# Altium PCB biv2-batb_1a.PcbDoc
Units mm, origin at the board's own origin, x right, y up, seen from the top; angles counter-clockwise.
Board outline 33 x 33 mm, 2 copper layers (Top Layer, Bottom Layer), stack 1.535 mm thick; 10 components, 10 nets, 39 pads, 15 vias.
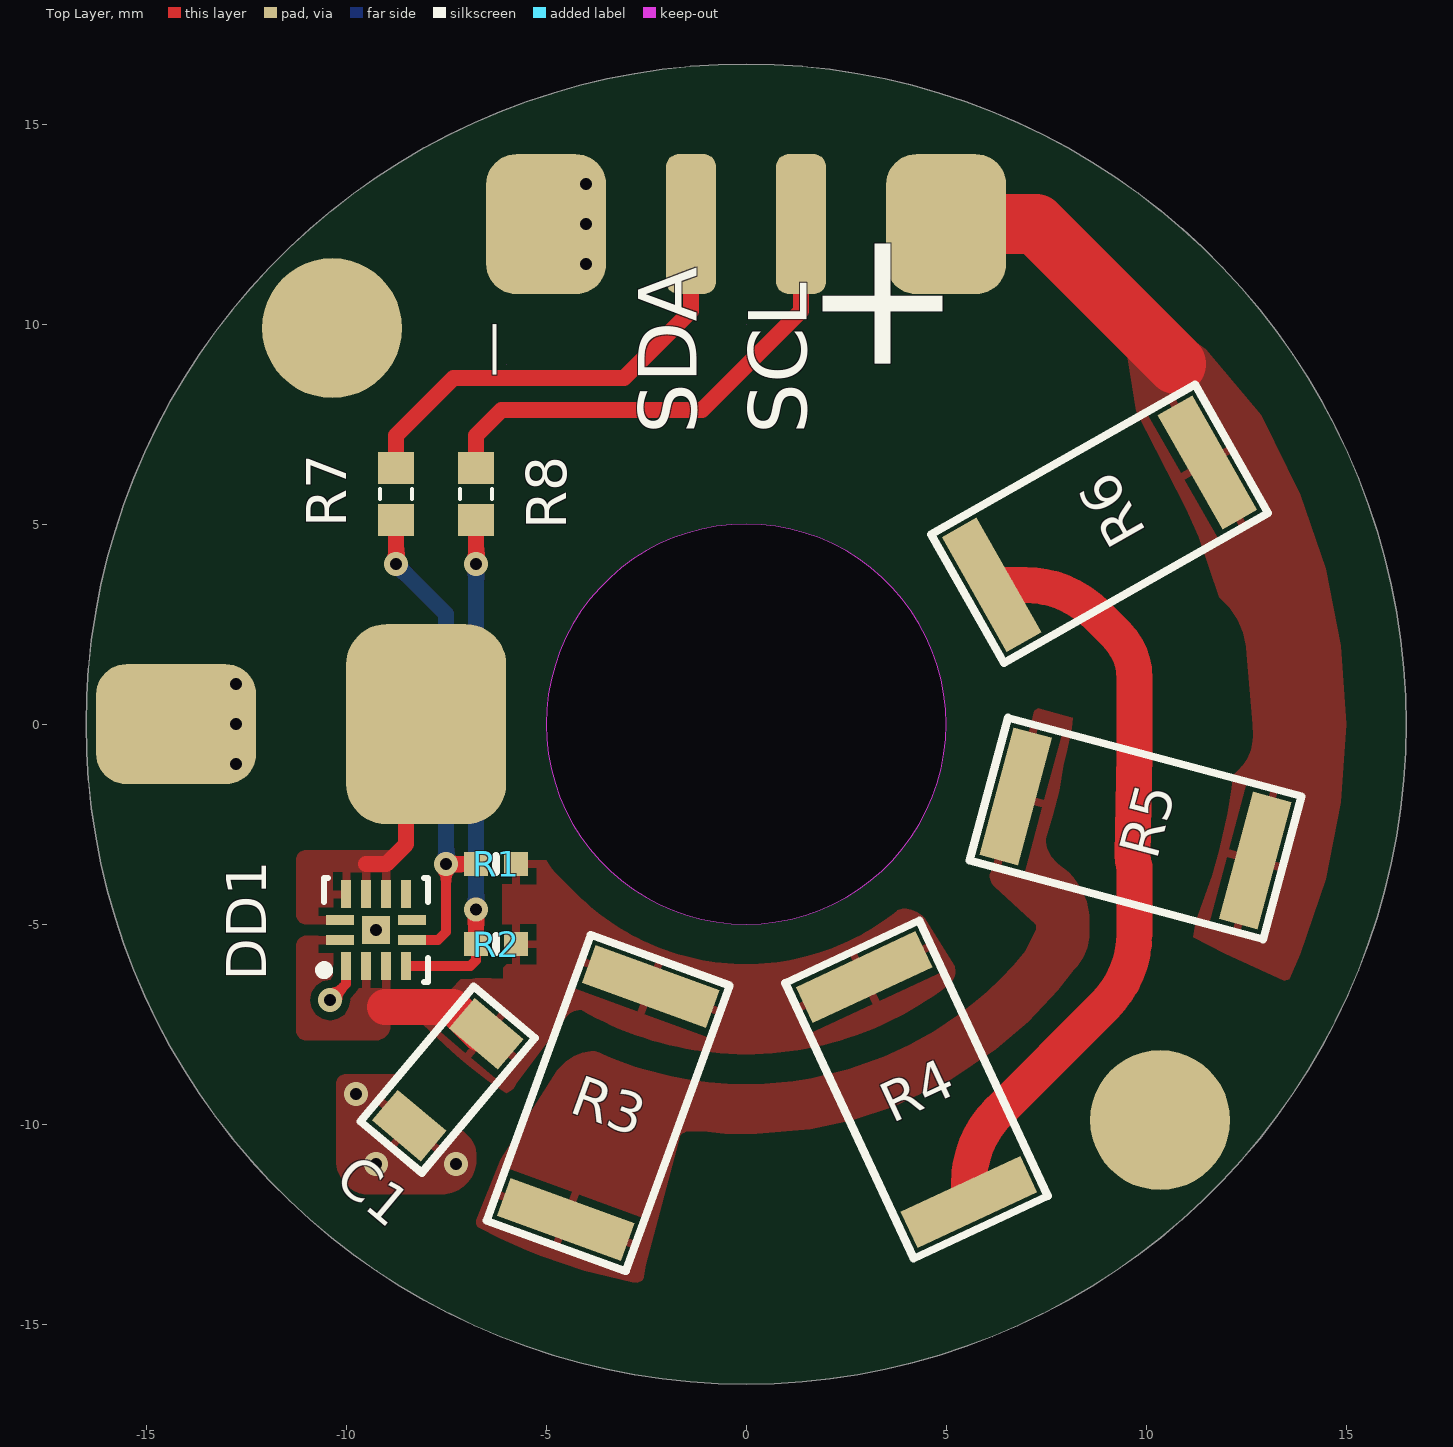
[diagram p0: Top Layer view]
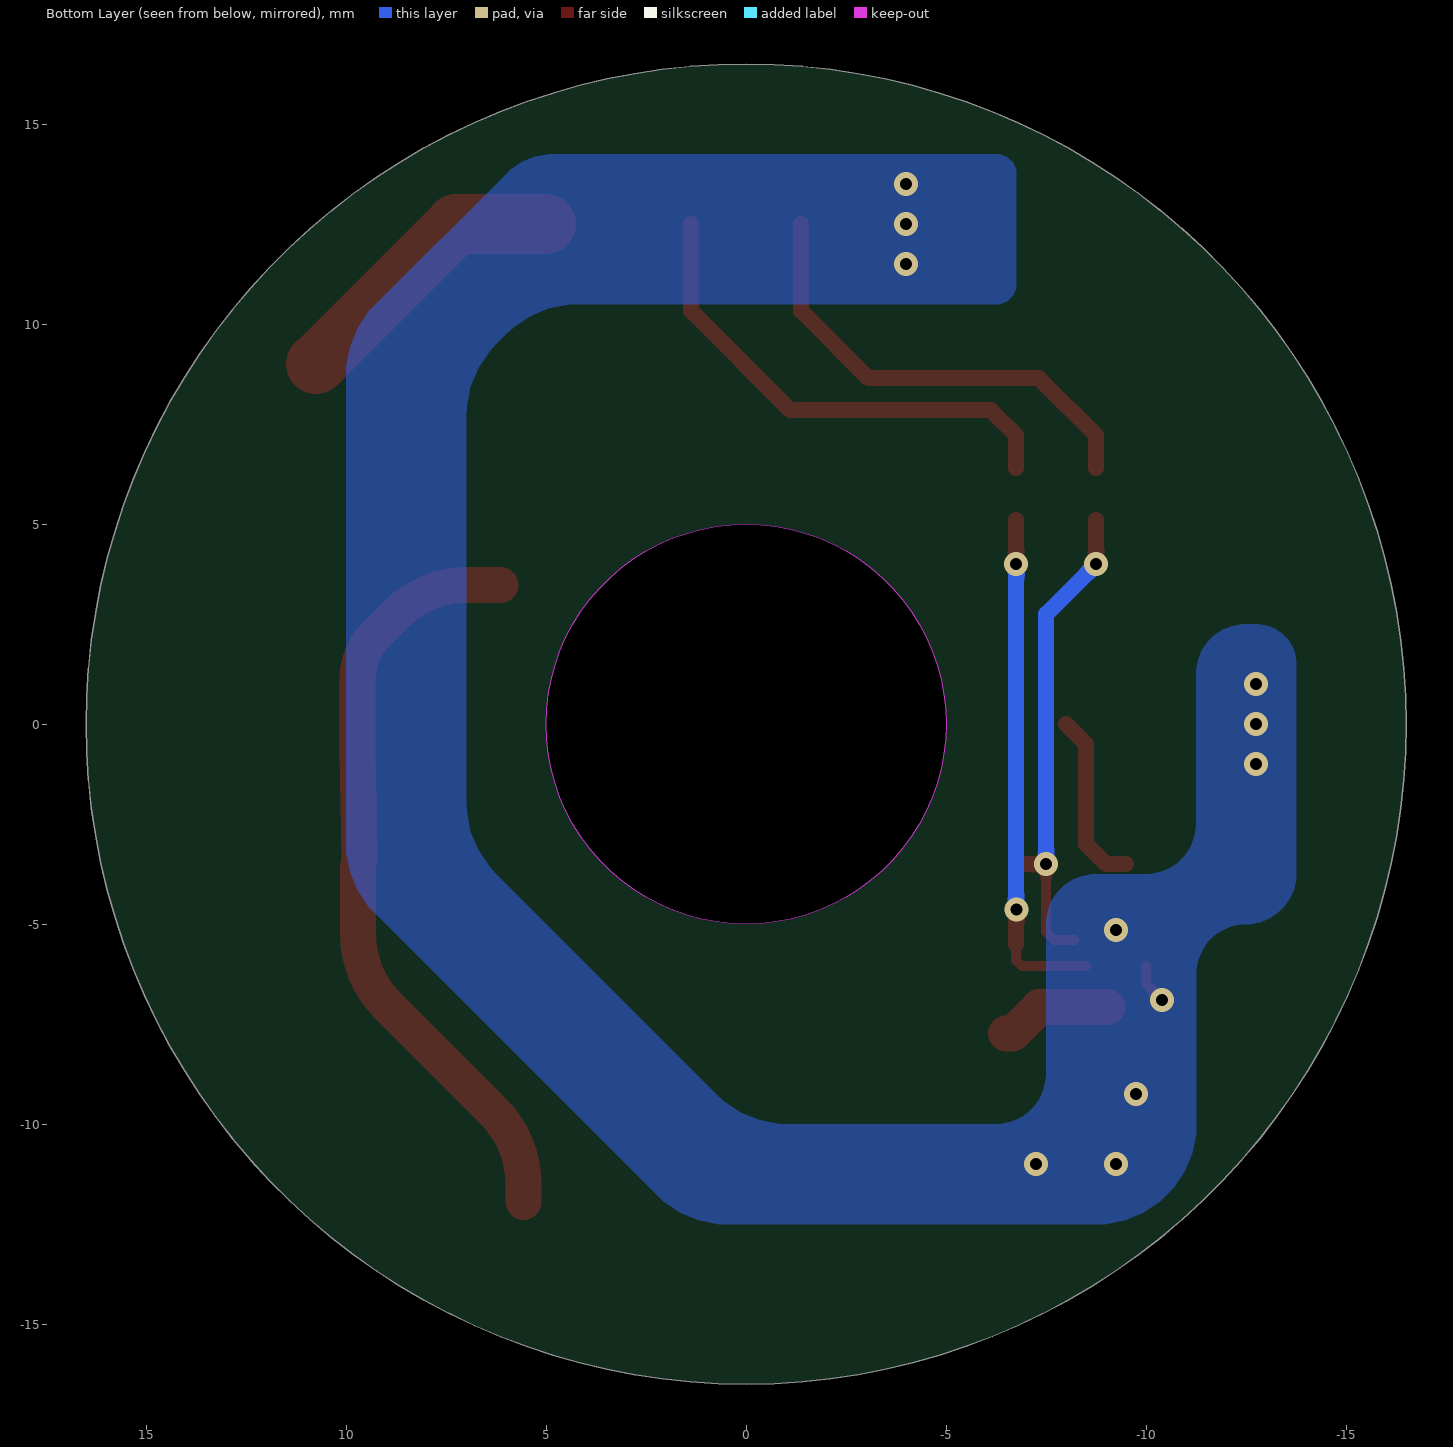
[diagram p1: Bottom Layer view, seen from below]
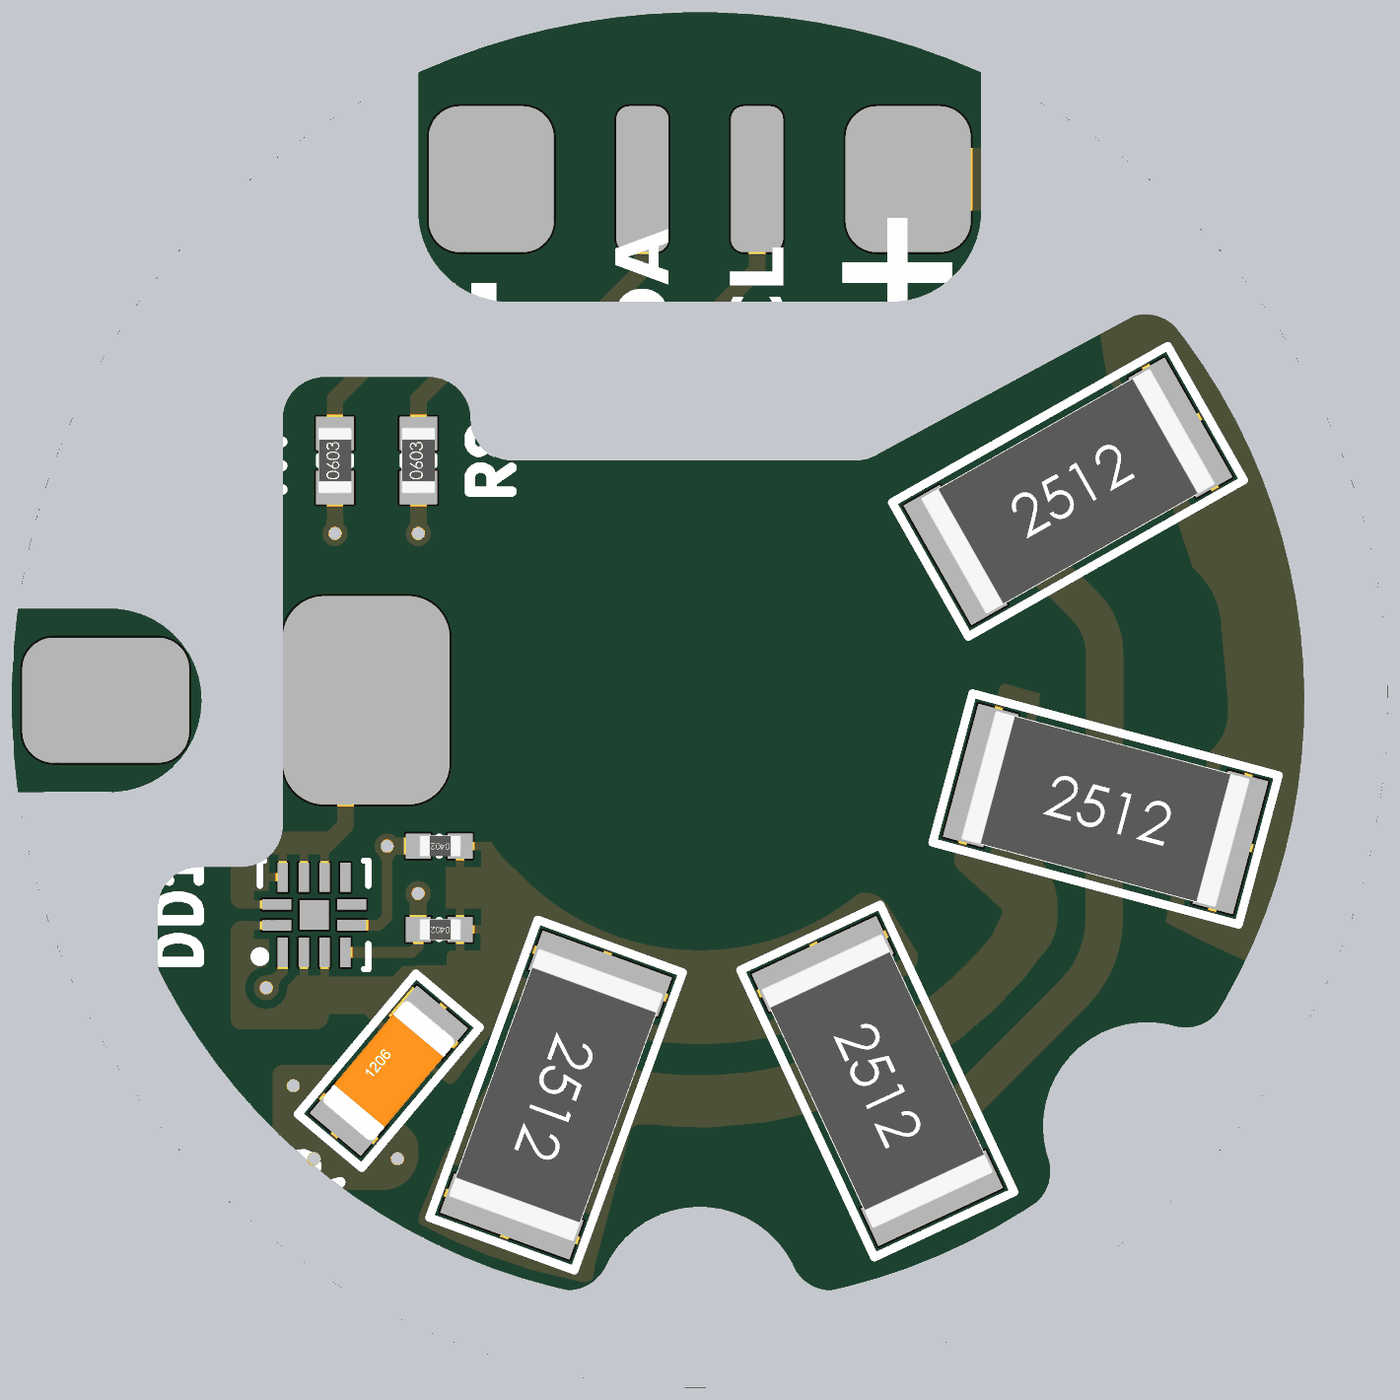
[diagram p2: 3D render of the assembled board from above, using the file's embedded part models]

## Layer stack, top to bottom
Top Solder: solder mask 0.0254, SM-001, Dk 4
Top Layer: signal copper 0.018
Dielectric 1: core 1.4986, Core-043, Dk 4.3
Bottom Layer: signal copper 0.018
Bottom Solder: solder mask 0.0254, SM-001, Dk 4

## Board outline
-16.5,0 ccw(c0,0) 0,-16.5 ccw(c0,0) 16.5,0 ccw(c0,0) 0,16.5 ccw(c0,0)
cut-out: -5,0 ccw(c0,0) 0,-5 ccw(c0,0) 5,0 ccw(c0,0) 0,5 ccw(c0,0)
cut-out: -6,9
cut-out: 0,10

## Design rules (kind name [scope] priority, off if disabled: settings)
AcuteAngle [All] p1: minimum=3.50000000000000E+0001 checktracksonly=FALSE
BoardOutlineClearance "BoardOutlineClearance 1" [All] p1: gap=0.25 ignorepadtopadclearanceinfootprint=FALSE except(0: Arc-SplitContinuation Track-SplitContinuation SMDPad-SplitContinuation THPad-SplitContinuation Via-SplitContinuation Fill-SplitContinuation Poly-SplitContinuation Region-SplitContinuation Text-SplitContinuation) // Milling
BoardOutlineClearance "BoardOutlineClearance 2" [All] p2: gap=0.4 ignorepadtopadclearanceinfootprint=FALSE except(0: Arc-SplitContinuation Track-SplitContinuation SMDPad-SplitContinuation THPad-SplitContinuation Via-SplitContinuation Fill-SplitContinuation Poly-SplitContinuation Region-SplitContinuation Text-SplitContinuation) // V-Cut
Clearance POWER [InNet('BAT_IN+') vs InNet('BAT_IN+')] p1: gap=0.125 ignorepadtopadclearanceinfootprint=FALSE except(0: SMDPad-Fill SMDPad-Poly SMDPad-Region; 0.1: Arc-Fill Arc-Poly Arc-Region Track-Fill Track-Poly Track-Region THPad-Fill THPad-Poly THPad-Region Via-Fill Via-Poly Via-Region Fill-Fill Fill-Poly Fill-Region Poly-Poly Poly-Region Region-Region; 0.2: SMDPad-SMDPad Fill-Text Poly-Text Region-Text; 0.25: Arc-Hole Track-Hole SMDPad-Hole THPad-Hole Via-Hole Fill-Hole Poly-Hole Region-Hole Text-Hole)
Clearance "Clearance-1 1 Oz" [All] p2: gap=0.2 ignorepadtopadclearanceinfootprint=TRUE except(0.25: Arc-Hole Track-Hole SMDPad-Hole THPad-Hole Via-Hole Fill-Hole Poly-Hole Region-Hole Text-Hole) // Standart
Clearance "Clearance-1 1/2 Oz" [All] p3: gap=0.125 ignorepadtopadclearanceinfootprint=FALSE except(0.2: Arc-Fill Arc-Poly Track-Fill Track-Poly SMDPad-SMDPad SMDPad-Fill SMDPad-Poly THPad-Fill THPad-Poly Via-Fill Via-Poly Fill-Fill Fill-Poly Poly-Poly Poly-Region Poly-Text; 0.25: Arc-Hole Track-Hole SMDPad-Hole THPad-Hole Via-Hole Fill-Hole Poly-Hole Region-Hole Text-Hole) // Standart
DiffPairsRouting "DiffPairsRouting 1 Oz" [All] p1: maxlimit=0.254 minlimit=0.2 mostfreqgap=0.254 toplayer_minwidth=0.2 toplayer_maxwidth=0.381 toplayer_prefwidth=0.381 bottomlayer_minwidth=0.2 bottomlayer_maxwidth=0.381 bottomlayer_prefwidth=0.381 maxuncoupledlength=12.7
DiffPairsRouting "DiffPairsRouting 1/2 Oz" [All] p2: maxlimit=0.254 minlimit=0.1 mostfreqgap=0.254 toplayer_minwidth=0.1 toplayer_maxwidth=0.381 toplayer_prefwidth=0.381 bottomlayer_minwidth=0.1 bottomlayer_maxwidth=0.381 bottomlayer_prefwidth=0.381 maxuncoupledlength=12.7
HoleSize "Minimum HoleSize" [IsPad] p1: absolutevalues=TRUE maxlimit=5.9 minlimit=0.6 maxpercent=80.000 minpercent=20.000
HoleSize "Minimum HoleSize VIA 1" [IsVia] p2: absolutevalues=TRUE maxlimit=5.9 minlimit=0.3 maxpercent=80.000 minpercent=20.000 // Standart
HoleToHoleClearance Hole2HoleClearance [All] p1: gap=0.25 allowstackedmicrovias=FALSE
MinimumAnnularRing "Minimum AR VIA Standart" [IsVia] p1: minimumring=0.15
MinimumAnnularRing "Minimum AR PAD Standart" [IsPAD] p2: minimumring=0.2
MinimumAnnularRing "Minimum AR VIA Advance" [IsVia] p3: minimumring=0.1
MinimumAnnularRing "Minimum AR PAD Advance" [IsPAD] p4: minimumring=0.15
MinimumSolderMaskSliver "SolderMask Bridge Standart" [All] p1: minsoldermaskwidth=0.15 // All Masks
MinimumSolderMaskSliver "SolderMask Bridge Advance" [All] p2: minsoldermaskwidth=0.1 // Mask LDI
PlaneClearance "PlaneClearance 1 Oz" [All] p1: clearance=0.2
PlaneClearance "PlaneClearance-1 1/2 Oz" [All] p2: clearance=0.2 // Standart
PlaneConnect "TermalConnect-1 1 Oz" [All] p1: planeconnectstyle=Relief reliefexpansion=0.2 reliefentries=4 reliefconductorwidth=0.2 reliefairgap=0.2 // Standart
PolygonConnect "PolygonConnect-1 1 Oz" [All] p1: thpad.connectstyle=Relief thpad.reliefconductorwidth=0.2 thpad.reliefentries=4 thpad.polygonreliefangle="90 Angle" thpad.airgapwidth=0.2 smdpad.connectstyle=Relief smdpad.reliefconductorwidth=0.2 smdpad.reliefentries=4 smdpad.polygonreliefangle="90 Angle" smdpad.airgapwidth=0.2 via.connectstyle=Direct via.reliefconductorwidth=0.254 via.reliefentries=4 via.polygonreliefangle="90 Angle" via.airgapwidth=0.254 // Standart
PolygonConnect "PolygonConnect-1 1/2 Oz" [All] p2: thpad.connectstyle=Relief thpad.reliefconductorwidth=0.15 thpad.reliefentries=4 thpad.polygonreliefangle="90 Angle" thpad.airgapwidth=0.2 smdpad.connectstyle=Relief smdpad.reliefconductorwidth=0.2 smdpad.reliefentries=4 smdpad.polygonreliefangle="90 Angle" smdpad.airgapwidth=0.2 via.connectstyle=Direct via.reliefconductorwidth=0.254 via.reliefentries=4 via.polygonreliefangle="90 Angle" via.airgapwidth=0.254 // Standart
RoutingCorners [All] p1 off: cornerstyle=45-Degree minsetback=2.54 maxsetback=2.54
RoutingVias [All] p1: holewidth=0.3 width=0.6 viastyle="Through Hole" minholewidth=0.2 minwidth=0.4 maxholewidth=5.9 maxwidth=6.4
ShortCircuit [All] p1: allowed=TRUE
SilkToSilkClearance Silk2SilkClearance [All] p1 off: silktosilkclearance=0.15
SilkToSolderMaskClearance Silk2SolderMaskClearance [IsPad] p1 off: minsilkscreentomaskgap=0.15 clearancetoexposedcopper=TRUE
SolderMaskExpansion SolderMaskExpansion-1 [All] p1: expansion=0.05 istentingtop=FALSE // Standart
SolderMaskExpansion "SolderMaskExpansion LDI" [All] p2: expansion=0.025 istentingtop=FALSE // Advance
UnRoutedNet [All] p1: checkbadconnections=TRUE
Width "Width 1 Oz" [All] p1: maxlimit=10 minlimit=0.15 preferedwidth=0.2 checkconnectedcopper=TRUE
Width "Width 1/2 Oz" [All] p2: maxlimit=10 minlimit=0.1 preferedwidth=0.125 checkconnectedcopper=TRUE
19 further rules are at their usual default settings.

## Components (designator, comment, footprint, x,y, rotation, side; value= is the part's Value field where it differs from the comment)
C1 "Ceramic capacitor, 100u, X7R, ±10%, 6V, 1206, -55...+125°C" "CAP: 1206" -7.459,-8.889 r50 top value=100u
DD1 "LTC3337" 12-LFCSP -9.25,-5.15 r90 top
R1 "Resistor film, 10k, , 0402, 0.063W, -55...+125°C" "RES: 0402" -6.25,-3.5 r180.04 top value=10k
R2 "Resistor film, 10k, , 0402, 0.063W, -55...+125°C" "RES: 0402" -6.25,-5.5 r179.88 top value=10k
R3 "Resistor film, 3.6, ±5%, 2512, 1W, -55...+125°C" "RES: 2512" -3.448,-9.472 r250 top value=3.6
R4 "Resistor film, 3.6, ±5%, 2512, 1W, -55...+125°C" "RES: 2512" 4.26,-9.136 r295 top value=3.6
R5 "Resistor film, 3.6, ±5%, 2512, 1W, -55...+125°C" "RES: 2512" 9.737,-2.609 r345 top value=3.6
R6 "Resistor film, 3.6, ±5%, 2512, 1W, -55...+125°C" "RES: 2512" 8.835,5.012 r29.57 top value=3.6
R7 "Resistor film, 240R, ±5%, 0603, 0.1W, -55...+125°C" "RES: 0603" -8.75,5.75 r90 top value=240R
R8 "Resistor film, 240R, ±5%, 0603, 0.1W, -55...+125°C" "RES: 0603" -6.75,5.75 r90 top value=240R

## Footprints (in the part's own frame and the unit in brackets; to place one, negate y for a bottom-side part, rotate by r counter-clockwise, add the part's x,y. Pads: shape width x height; smd on the part's side, far side on the other; paste and mask are expansions set on the pad)
12-LFCSP [mm]
  rect 0.7x0.25 smd: 1(-0.9,0.75) 2(-0.9,0.25) 3(-0.9,-0.25) 4(-0.9,-0.75) 7(0.9,-0.75) 8(0.9,-0.25) 9(0.9,0.25) 10(0.9,0.75)
  rect 0.25x0.7 smd: 5(-0.25,-0.9) 6(0.25,-0.9) 11(0.25,0.9) 12(-0.25,0.9)
  rect 0.7x0.7 smd: 13(0,0)
  silkscreen extent -1.3,-1.3 1.3,1.4, body extent -1,-1 2.5,1, height 1.27
"CAP: 1206" [mm]
  rect 1x1.6 smd: 1(-1.5,0) 2(1.5,0)
  silkscreen extent -2.2,-1 2.2,1, body extent -1.6,-0.8 1.6,0.8, height 1
"RES: 0402" [mm]
  rect 0.6x0.6 smd: 1(-0.5,0) 2(0.5,0)
  silkscreen extent 0,-0.2 0,0.2, body extent -0.53,-0.25 0.47,0.25, height 0.34
"RES: 0603" [mm]
  rect 0.8x0.9 smd: 1(-0.65,0) 2(0.65,0)
  silkscreen extent -0.13,-0.4 0.13,0.4, body extent -0.8,-0.4 0.8,0.4, height 0.44
"RES: 2512" [mm]
  rect 1x3.3 smd: 1(-3.1,0) 2(3.1,0)
  silkscreen extent -3.8,-1.85 3.8,1.85, body extent -3.18,-1.6 3.18,1.6, height 0.52

## Part data
C1: library part Ceramic_1206, Manufacturer=Yageo, Package=1206, PartNumber=CC1206KRX7R9BB104, Temperature=-55...+125°C, Tolerance=±10%, TypeCapacitor="Ceramic capacitor", TypeDielectric=X7R, Voltage=6V, HelpURL=https://www.digikey.com/product-detail/en/yageo/CC1206KRX7R9BB104/311-1179-1-ND/303089, ValueManufacturerPartNumber="Ceramic capacitor, 100u, X7R, ±10%, 6V, 1206, -55...+125°C"
DD1: "Battery SOH monitor", ComponentLink1Description=Datasheet, ComponentLink1URL=https://www.analog.com/en/products/ltc3337.html
R1 R2: library part Resistor_0402, Manufacturer=Yageo, Package=0402, PartNumber=RC0402JR-07100RL, Power=0.063W, Temperature=-55...+125°C, TypeResistor="Resistor film", HelpURL=https://www.digikey.com/product-detail/en/yageo/RC0402JR-07100RL/311-100JRCT-ND/729362, ValueManufacturerPartNumber="Resistor film, 10k, , 0402, 0.063W, -55...+125°C"
R3 R4 R5 R6: library part Resistor_2512, Manufacturer=Yageo, Package=2512, PartNumber=RC2512JK-07100RL, Power=1W, Temperature=-55...+125°C, Tolerance=±5%, TypeResistor="Resistor film", HelpURL=https://www.digikey.com/product-detail/en/yageo/RC2512JK-07100RL/YAG3393CT-ND/5962215, ValueManufacturerPartNumber="Resistor film, 3.6, ±5%, 2512, 1W, -55...+125°C"
R7 R8: library part Resistor_0603, Manufacturer=Yageo, Package=0603, PartNumber=RC0603JR-07100RL, Power=0.1W, Temperature=-55...+125°C, Tolerance=±5%, TypeResistor="Resistor film", HelpURL=https://www.digikey.com/product-detail/en/yageo/RC0603JR-07100RL/311-100GRCT-ND/729644, ValueManufacturerPartNumber="Resistor film, 240R, ±5%, 0603, 0.1W, -55...+125°C"

## Free pads (board coordinates)
  round 3.5 smd: 0(-10.35,9.9) 0(10.35,-9.9)
  rrect50% 4x3 smd: 1(-14.25,0)
  rrect50% 3x3.5 smd: 1(-5,12.5) 1(5,12.5)
  rrect50% 1.25x3.5 smd: 1(-1.375,12.5) 1(1.375,12.5)
  rrect50% 4x5 smd: 2(-8,-0.001)

## Via types
v1: diameter 0.6, hole 0.3, Top Layer to Bottom Layer, tented both sides, 15 vias

## Nets (pads, with @x,y where several pads share a name; then routed paths per layer and width w, separated by ;. In a path a pad name is that pad's centre, name@x,y a point inside that pad or via, vN(x,y) a via of type N, cw(c..) or ccw(c..) an arc to the next point about the centre after c; other vN are vias at no path point)
+U: pad.1@5,12.5 R5.2 R6.2 | length 7.2
  Top Layer w1.5: pad.1@5,12.5 7.25,12.5 10.75,9
-U: C1.1 DD1.1 DD1.13 pad.1@-5,12.5 pad.1@-14.25,0 | length 1
  Top Layer w0.25: v1(-10.4,-6.9) -10,-6.5 DD1.1
  other v1: -9.25,-11 -7.25,-11 -9.75,-9.25 -9.25,-5.15 -12.75,-1 -12.75,0 -12.75,1 -4,11.5 -4,12.5 -4,13.5
BAT+: C1.2 DD1.2 DD1.3 DD1.12 R1.1 R2.1 R3.1 R4.1 | length 2.8
  Top Layer w0.9: -9.033,-7.078 -7.323,-7.078 -6.661,-7.74 C1.2
BAT_IN+: DD1.8 DD1.9 DD1.10 DD1.11 pad.2 | length 4.4
  Top Layer w0.4: -9.5,-3.5 -9,-3.5 -8.5,-3 -8.5,-0.501 pad.2
NetDD1_4: DD1.4 R2.2 R8.1 | length 12.8
  Top Layer w0.25: DD1.4 -6.896,-6.05 -6.75,-5.904 R2.2
  Top Layer w0.4: v1(-6.756,-4.638) -6.753,-4.641 -6.753,-5.496 R2.2 ; v1(-6.75,4) R8.1
  Bottom Layer w0.25: v1(-6.756,-4.638) v1@-6.75,-4.632
  Bottom Layer w0.4: v1@-6.75,-4.632 v1(-6.75,4)
NetDD1_5: DD1.5 R1.2 R7.1 | length 12.4
  Top Layer w0.25: DD1.5@-8.205,-5.4 -7.7,-5.4 -7.5,-5.2 v1(-7.5,-3.5)
  Top Layer w0.4: v1(-8.75,4) R7.1 ; v1(-7.5,-3.5) R1.2
  Bottom Layer w0.4: v1(-8.75,4) -7.5,2.75 v1(-7.5,-3.5)
NetR3_2: R3.2 R5.1
NetR4_2: R4.2 R6.1 | length 19.3
  Top Layer w0.9: R4.2 5.57,-11.482 cw(c8.11,-11.482) 6.314,-9.686 8.96,-7.04 ccw(c7.163,-5.244) 9.703,-5.244 9.703,-3.558 cw(c10.565,-3.296) 9.665,-3.279 9.713,-0.745 9.713,1.133 ccw(c8.133,1.133) 9.25,2.25 8.761,2.739 ccw(c6.965,0.943) 6.965,3.483 R6.1
SCL: pad.1@1.375,12.5 R8.2 | length 12.4
  Top Layer w0.4: R8.2 -6.75,6.5 -6.75,7.22 -6.12,7.85 -1.105,7.85 1.375,10.33 pad.1@1.375,12.5
SDA: pad.1@-1.375,12.5 R7.2 | length 11.7
  Top Layer w0.4: R7.2 -8.75,6.5 -8.75,7.22 -7.32,8.65 -3.055,8.65 -1.375,10.33 pad.1@-1.375,12.5
pads on no net: DD1.6 DD1.7

## Polygon pours and split planes (outlines as drawn)
BAT+ on Top Layer "BAT+_L01_P013" (solid, pour order 13): 4.465,-4.848 ccw(c3.898,-5.416) 3.898,-4.613 3.836,-4.613 3.776,-4.663 3.653,-4.76 3.527,-4.854 3.398,-4.945 3.268,-5.032 3.135,-5.116 3,-5.196 2.863,-5.273 2.724,-5.346 2.583,-5.416 2.44,-5.481 2.296,-5.543 2.15,-5.601 2.003,-5.656 1.854,-5.706 1.553,-5.796 1.401,-5.834 1.247,-5.869 1.093,-5.9 0.939,-5.926 0.783,-5.949 0.627,-5.967 0.471,-5.982 0.314,-5.992 0.157,-5.998 0,-6 -0.157,-5.998 -0.314,-5.992 -0.471,-5.982 -0.627,-5.967 -0.783,-5.949 -0.939,-5.926 -1.093,-5.9 -1.247,-5.869 -1.401,-5.834 -1.553,-5.796 -1.704,-5.753 -1.854,-5.706 -2.003,-5.656 -2.15,-5.601 -2.296,-5.543 -2.44,-5.481 -2.583,-5.416 -2.724,-5.346 -2.863,-5.273 -3,-5.196 -3.135,-5.116 -3.268,-5.032 -3.398,-4.945 -3.527,-4.854 -3.653,-4.76 -3.776,-4.663 -3.897,-4.562 -4.015,-4.459 -4.13,-4.352 -4.467,-4.024 -4.499,-3.993 -4.752,-3.74 cw(c-3.913,-2.9) -4.991,-3.398 -6.1,-3.398 -6.1,-5 -6.071,-6.361 -6.367,-6.356 -7.113,-6.356 -8.148,-7.446 -7.36,-8.175 -7.144,-8.364 -6.923,-8.549 -6.696,-8.727 -6.466,-8.899 -6.23,-9.065 -5.991,-9.225 -6,-9.247 ccw(c-6.24,-8.762) -5.755,-9.002 -4.523,-7.358 cw(c-4.143,-7.591) -4.143,-7.145 -4.125,-7.145 -3.937,-7.25 -3.745,-7.351 -3.552,-7.446 -3.356,-7.537 -3.157,-7.622 -2.957,-7.702 -2.754,-7.777 -2.549,-7.846 -2.343,-7.91 -2.135,-7.969 -1.926,-8.022 -1.715,-8.07 -1.503,-8.112 -1.291,-8.148 -1.077,-8.179 -0.862,-8.205 -0.647,-8.225 -0.432,-8.239 -0.216,-8.247 0,-8.25 0.216,-8.247 0.432,-8.239 0.647,-8.225 0.862,-8.205 1.077,-8.179 1.291,-8.148 1.503,-8.112 1.715,-8.07 1.926,-8.022 2.135,-7.969 2.343,-7.91 2.549,-7.846 2.754,-7.777 2.957,-7.702 3.157,-7.622 3.356,-7.537 3.552,-7.446 3.937,-7.25 4.125,-7.145 4.311,-7.034 4.493,-6.919 4.673,-6.799 4.849,-6.674 5.022,-6.545 5.107,-6.478 ccw(c4.804,-6.174) 5.233,-6.174 5.233,-6.078
-U on Top Layer "-U_L01_P030" (solid, pour order 30): -10,-8.75 -8.752,-8.75 cw(c-8.75,-9.354) -8.323,-8.927 -6.927,-10.323 cw(c-7.354,-10.75) -6.75,-10.75 -6.75,-10.896 cw(c-7.604,-10.896) -7,-11.5 cw(c-7.604,-10.896) -7.604,-11.75 -9.5,-11.75 cw(c-9.5,-11.146) -9.927,-11.573 -10,-11.5 cw(c-9.396,-10.896) -10.25,-10.896 -10.25,-9 cw(c-10,-9)
NetR3_2 on Top Layer "NETR3_2_L01_P021" (solid, pour order 21): 8.581,-4.96 8.581,-5.194 cw(c7.238,-5.194) 8.188,-6.144 7.794,-6.657 7.056,-7.435 6.24,-8.132 5.125,-8.877 3.673,-9.569 2.653,-9.901 1.603,-10.124 0.268,-10.246 -0.536,-10.236 -1.07,-10.18 -1.407,-10.18 ccw(c-1.408,-10.514) -1.644,-10.278 -2.506,-13.52 -2.559,-13.807 cw(c-2.717,-13.806) -2.719,-13.964 -2.796,-13.964 -4.047,-13.663 -5.107,-13.304 -5.453,-13.165 -6.135,-12.862 -6.701,-12.573 cw(c-6.58,-12.452) -6.751,-12.452 -6.751,-12.404 -6.135,-10.882 -4.72,-8.653 -4.573,-8.506 cw(c-3.768,-9.311) -3.768,-8.173 -3.661,-8.222 -3.444,-8.315 -3.225,-8.402 -2.781,-8.56 -2.556,-8.629 -1.871,-8.803 -1.408,-8.889 -0.941,-8.951 -0.471,-8.988 0,-9 0.471,-8.988 1.175,-8.923 1.64,-8.849 2.556,-8.629 3.444,-8.315 4.086,-8.019 4.294,-7.909 4.702,-7.674 5.29,-7.281 5.664,-6.994 6.022,-6.688 6.364,-6.364 6.688,-6.022 6.994,-5.664 7.254,-5.122 7.254,-5.068 ccw(c7.137,-5.068) 7.219,-4.984 6.218,-4.071 cw(c6.502,-3.781) 6.096,-3.785 6.096,-3.76 6.155,-3.614 6.163,-3.326 5.998,-3.002 6.24,-2.012 6.489,-0.993 6.75,-0.25 7.077,-0.19 7.219,0.428 7.975,0.209 8.169,0.159 8.144,-0.108 8.029,-0.63 7.932,-1.044 7.825,-1.663 7.671,-2.272 7.608,-2.472 7.486,-2.867 ccw(c8.256,-2.867) 7.711,-3.411 7.794,-3.494 8.06,-3.7 cw(c6.8,-4.959)
+U on Top Layer "+U_L01_P022" (solid, pour order 22): 11.833,3.171 11.967,3.036 cw(c10.69,1.735) 12.513,1.751 12.67,-0.004 12.673,-0.308 cw(c11.508,-0.308) 12.332,-1.132 12.183,-1.28 12.145,-1.599 12.045,-2.232 11.833,-3.171 11.65,-3.785 11.243,-4.937 11.177,-5.328 11.981,-5.738 13.539,-6.458 13.858,-5.74 14.489,-3.882 14.872,-1.958 15,0 14.872,1.958 14.489,3.882 13.858,5.74 12.879,7.725 11.489,9.375 11.085,9.665 9.541,9.151 9.759,7.821 10.765,5.845 11.057,5.274 11.318,4.688
no net on Top Layer "NONET_L01_P020" (solid, pour order 20): -6.442,-11.864
no net on Top Layer "NONET_L01_P016" (solid, pour order 16): -6.75,-12.25
no net on Top Layer "NONET_L01_P015" (solid, pour order 15): -7,-12.5
no net on Top Layer "NONET_L01_P014" (solid, pour order 14): -7.5,-12.5
no net on Top Layer "NONET_L01_P010" (solid, pour order 10): -7.572,-7.979
no net on Top Layer "NONET_L01_P009" (solid, pour order 9): -7.778,-7.778
no net on Top Layer "NONET_L01_P006" (solid, pour order 6): 0,-6
BAT+ on Top Layer "BAT+_L01_P004" (solid, pour order 4): -9.25,-7.9 ccw(c-9.25,-7.546) -8.896,-7.546 -8.896,-5.65 -9.75,-5.65 -9.75,-5.297 -11,-5.297 ccw(c-11,-5.547) -11.25,-5.547 -11.25,-5.65 -11.25,-7.65 ccw(c-11,-7.65) -11,-7.9
BAT_IN+ on Top Layer "BAT_IN+_L01_P003" (solid, pour order 3): -11.25,-4.65 -11.25,-4.751 ccw(c-11.001,-4.751) -11.002,-5 -9.75,-5 -9.75,-4.55 -8.9,-4.55 -8.9,-3.15 -11,-3.15 ccw(c-11,-3.4) -11.25,-3.4
no net on Top Layer "NONET_L01_P000" (solid, pour order 0): -10.5,3
-U on Bottom Layer "Bottom Layer--U" (solid, pour order 29): -8.75,-12.5 0.448,-12.5 ccw(c0.448,-9.96) 2.244,-11.756 9.256,-4.744 ccw(c7.46,-2.948) 10,-2.948 10,8.698 ccw(c7.46,8.698) 9.256,10.494 6,13.75 ccw(c4.793,12.543) 4.793,14.25 3.293,14.25 -6.25,14.25 ccw(c-6.25,13.75) -6.75,13.75 -6.75,11 ccw(c-6.25,11) -6.25,10.5 4.198,10.5 cw(c4.198,7.96) 5.994,9.756 6.256,9.494 cw(c4.46,7.698) 7,7.698 7,-1.948 cw(c4.46,-1.948) 6.256,-3.744 0.744,-9.256 cw(c-1.052,-7.46) -1.052,-10 -6.25,-10 cw(c-6.25,-8.75) -7.5,-8.75 -7.5,-5 ccw(c-8.75,-5) -8.75,-3.75 -10,-3.75 cw(c-10,-2.5) -11.25,-2.5 -11.25,1.25 ccw(c-12.5,1.25) -12.5,2.5 -12.747,2.5 ccw(c-12.75,1.5) -13.75,1.5 -13.75,-3.75 ccw(c-12.5,-3.75) -12.5,-5 cw(c-12.5,-6.25) -11.25,-6.25 -11.25,-10 ccw(c-8.75,-10)

## Silkscreen, mask and mechanical layers (free items; w line width, h text height)
Top Overlay:
  text "-" at -3.978,8.5 h6 r90
  text "+" at 6.061,8.5 h6 r90
  text "SDA" at -0.75,7.25 h2.5 r90
  text "SCL" at 2,7.25 h2.5 r90
Board:
  circle w0.1: c0,0 r5
  circle w0.1: c0,0 r16.5
Sketch:
  lines w0.1: -16.353,2.195 cw(c0,0) -6.75,15.056 -6.75,11.75 ccw(c-4.555,11.75) -4.555,9.555 4.555,9.555 ccw(c4.555,11.75) 6.75,11.75 6.75,15.056 cw(c0,0) -16.353,-2.2 ; -16.35,-2.2 -14.195,-2.2 ; -16.35,2.195 -14.15,2.195 cw(c-14.15,0) -14.195,-2.195 ; -13.002,-6.25 -13,-5 cw(c-12,-5) -12,-4 -11,-4 ccw(c-11,-3) -10,-3 -10,6.75 cw(c-9,6.75) -9,7.75 -6.5,7.75 cw(c-6.5,6.75) -5.5,6.75 ccw(c-4.5,6.75) -4.5,5.75 3.75,5.75 ccw(c3.75,6.75) 4.305,5.918 10.414,9.219 ; -13,-6.25 ccw(c-12,-6.25) -12.975,-6.474 ccw(c0,0) -3.16,-14.151 ; -3.16,-14.148 ccw(c-3.16,-13.148) -2.244,-13.55 cw(c0,-14.652) 2.29,-13.65 ccw(c3.16,-13.156) 3.139,-14.156 ccw(c0,0) 8.091,-12.032 ccw(c7.407,-11.303) 8.375,-11.05 ; 8.376,-11.05 cw(c10.735,-10.224) 11.341,-7.798 ; 10.416,9.215 cw(c10.692,8.254) 11.399,8.962 cw(c0,0) 12.409,-7.501 cw(c11.65,-6.85) 11.34,-7.801